# Altium PCB Powerdist Darput.PcbDoc
Units mm, origin at the board's own origin, x right, y up, seen from the top; angles counter-clockwise.
Board outline 152.4 x 101.6 mm, 2 copper layers (Top Layer, Bottom Layer); 25 components, 13 nets, 54 pads, 0 vias.
Unrouted connection lines stored in the file: 3.
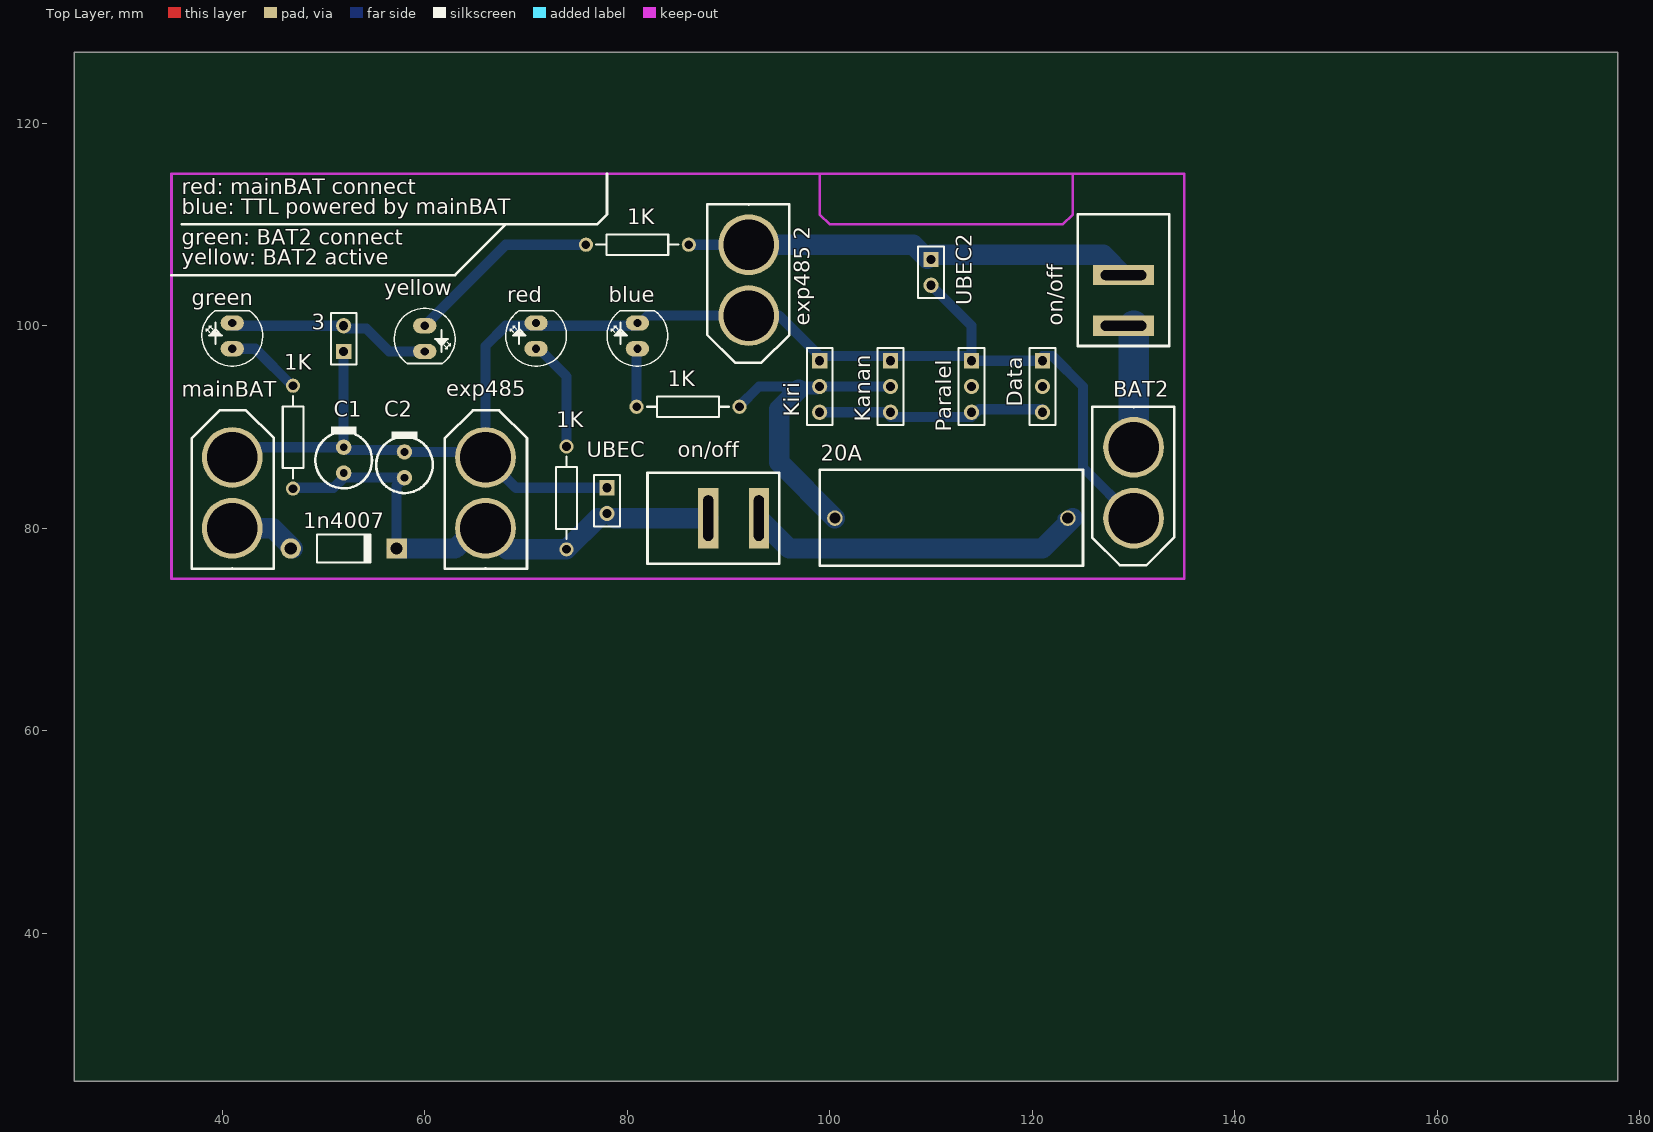
[diagram p0: Top Layer view]
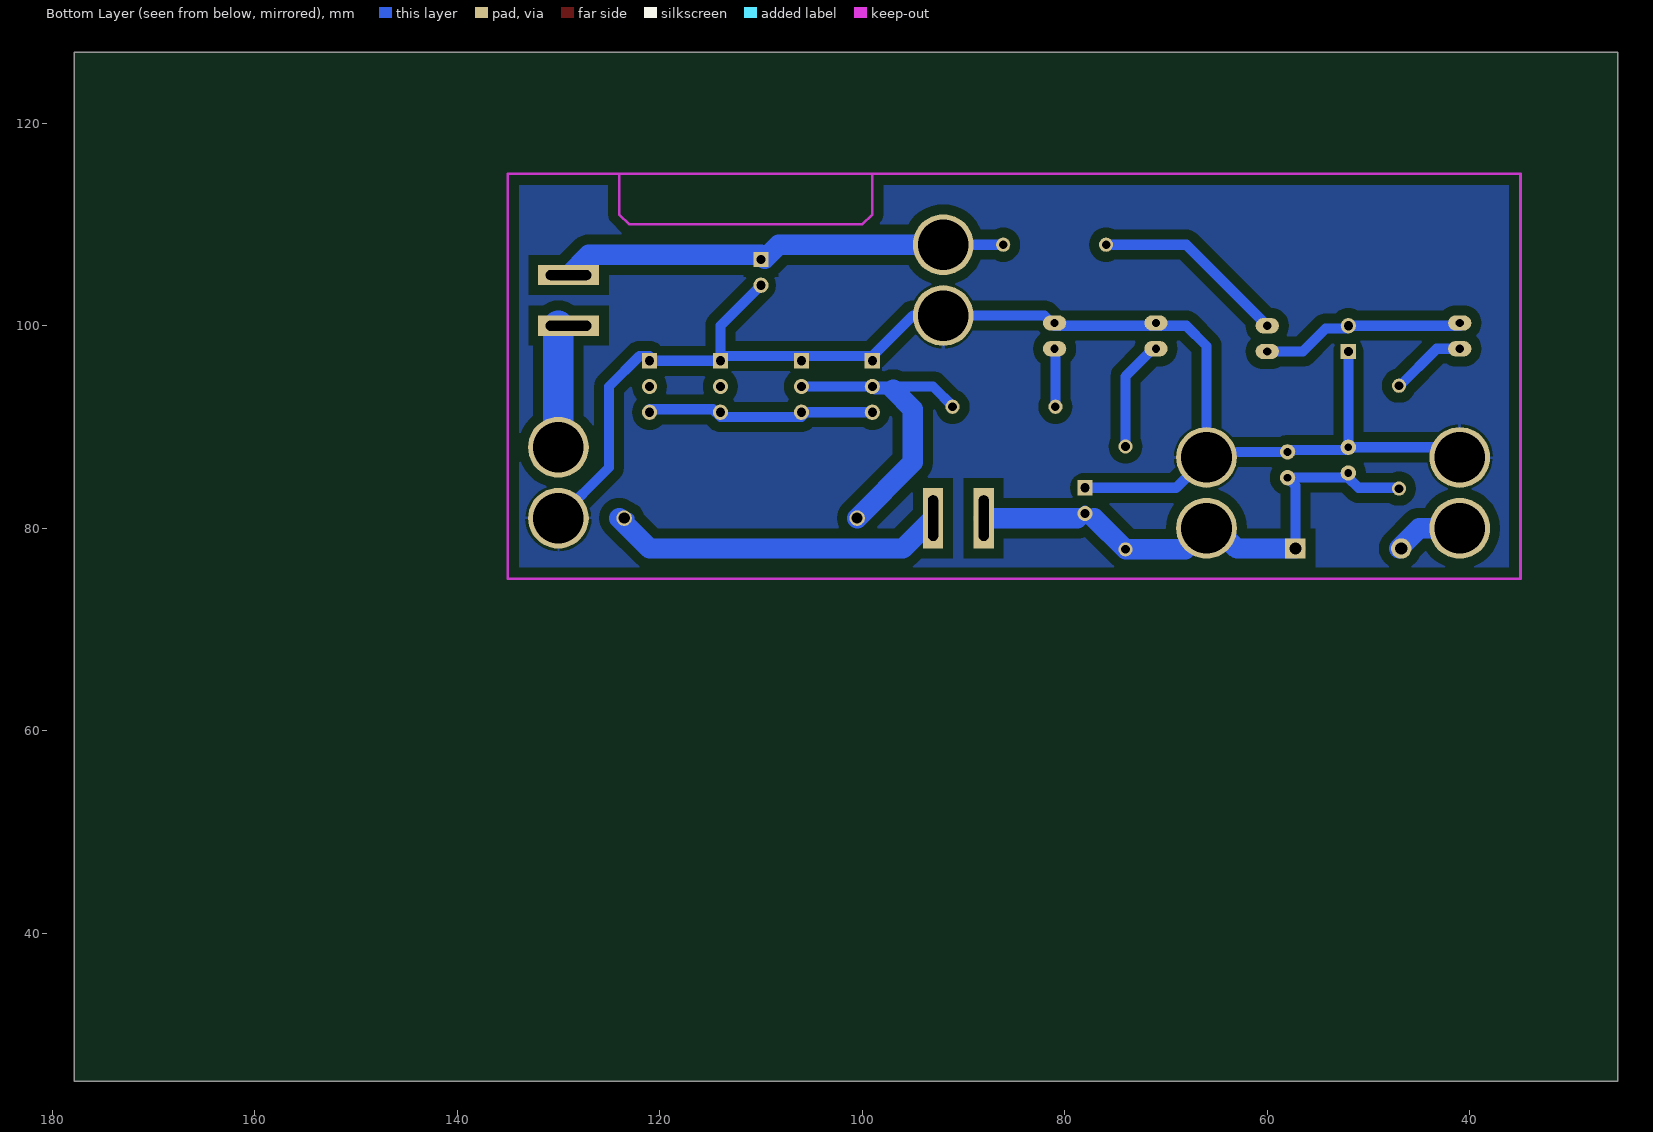
[diagram p1: Bottom Layer view, seen from below]

## Layer stack, top to bottom
Top Solder: solder mask 0.0102, Solder Resist, Dk 3.5
Top Layer: signal copper 0.0356
Dielectric 1: dielectric 0.32, FR-4, Dk 4.8
Bottom Layer: signal copper 0.0356
Bottom Solder: solder mask 0.0102, Solder Resist, Dk 3.5

## Board outline
25.4,25.4 177.8,25.4 177.8,127 25.4,127

## Design rules (kind name [scope] priority, off if disabled: settings)
Clearance [All] p1: gap=1
PolygonConnect [All] p1: connectstyle=Relief reliefconductorwidth=0.254 reliefentries=4 polygonreliefangle="90 Angle" airgapwidth=0.254
RoutingVias [All] p1: holewidth=0.711 width=1.27 viastyle="Through Hole" minholewidth=0.711 minwidth=1.27 maxholewidth=0.711 maxwidth=1.27
SolderMaskExpansion [All] p1: expansion=0.102
UnpouredPolygon [All] p1: allowunpoured=FALSE
Width [All] p1: maxlimit=1 minlimit=1 preferedwidth=1
29 further rules are at their usual default settings.

## Classes and differential pairs
component class "Powerdist Darput": 1K 1n4007 3 20A BAT2 blue C1 C2 Data exp485 green Kanan Kiri mainBAT on/off Paralel red yellow

## Components (designator, comment, footprint, x,y, rotation, side; value= is the part's Value field where it differs from the comment)
1K "Res2" AXIAL-0.4 86,92 r180 top
1K "Res1" AXIAL-0.4 74,83 r270 top (schematic designator "5 ohm")
1K "Res3" AXIAL-0.4 81,108 r180 top (schematic designator hehe)
1K "Res4" AXIAL-0.4 47,89 r90 top (schematic designator new)
1n4007 "Diode 1N4007" DO-41 52,78 r0 top (schematic designator 5A)
3 "Header 2" HDR1X2 52,97.46 r90 top
20A "Fuse" PCBComponent_1#1 103,81 r0 top
BAT2 "BAT2" PCBComponent_1#2 127,90 r270 top (schematic designator 2)
blue "Blue" "LED5mm R" 81,99 r90 top (schematic designator 3.6V)
C1 "Cap Pol" "CAPASITOR RAD 5.6 mm \"1/.2\"" 52,85.46 r270 top
C2 "Cap Pol" "CAPASITOR RAD 5.6 mm \"1/.2\"" 58,85 r270 top
Data "Header 3" HDR1X3 121,96.54 r270 top
exp485 "EXP485" PCBComponent_1#2 69,78 r90 top (schematic designator 12V)
"exp485 2" "EXP485 2" PCBComponent_1#2 89,110 r270 top (schematic designator 12V)
green "green" "LED5mm R" 41,99 r90 top (schematic designator 5V)
Kanan "Header 3" HDR1X3 106,96.54 r270 top (schematic designator "Kaki kanan")
Kiri "Header 3" HDR1X3 99,96.54 r270 top (schematic designator "Kaki kiri")
mainBAT "MainBAT" PCBComponent_1#2 44,78 r90 top (schematic designator sup)
on/off "main switch" PCBComponent_1#3 88,81 r0 top (schematic designator simple)
on/off "2nd switch" PCBComponent_1#3 129,105 r270 top (schematic designator switch)
Paralel "Header 3" HDR1X3 114,96.54 r270 top
red "Red" "LED5mm R" 71,99 r90 top (schematic designator 1.8V)
UBEC "UBEC" HDR1X2 78,84 r270 top (schematic designator 5V)
UBEC2 "UBEC2" HDR1X2 110,106.54 r270 top (schematic designator 5V)
yellow "yellow" "LED5mm R" 60,98.73 r270 top (schematic designator 7V)

## Footprints (in the part's own frame and the unit in brackets; to place one, negate y for a bottom-side part, rotate by r counter-clockwise, add the part's x,y. Pads: shape width x height; smd on the part's side, far side on the other; paste and mask are expansions set on the pad)
AXIAL-0.4 [mm] "Axial Device, Thru-Hole; 2 Leads; 0.4 in Pin Spacing"
  round 1.4 hole 0.85: 1(-5.08,0) 2(5.08,0)
  silkscreen extent -4.06,-1.02 4.06,1.02
"CAPASITOR RAD 5.6 mm \"1/.2\"" [mil]
  round 60 hole 30: 1(0,0) 2(-100,0)
  silkscreen extent -180,-110 60,110, body extent -149,-99 51,101, height 67
DO-41 [mm] "Diode, Axial; Body 5.2 x 2.7 mm (LxDia. max), Lead Dia. 0.86 mm (max)"
  round 2 hole 1.2: 1(-5.23,0)
  rect 2x2 hole 1.2: 2(5.23,0)
  silkscreen extent -2.65,-1.4 2.75,1.4
HDR1X2 [mm] "Connector; Header; 2 Position"
  rect 1.5x1.5 hole 0.9: 1(0,0)
  round 1.5 hole 0.9: 2(2.54,0)
  silkscreen extent -1.27,-1.27 3.81,1.27
HDR1X3 [mm] "Connector; Header; 3 Position"
  rect 1.5x1.5 hole 0.9: 1(0,0)
  round 1.5 hole 0.9: 2(2.54,0) 3(5.08,0)
  silkscreen extent -1.27,-1.27 6.35,1.27
"LED5mm R" [mm]
  oval 1.5x2.3 hole 0.8: 1(-1.27,0) 2(1.27,0)
  silkscreen extent -3,-3 2.46,3, body extent -3,-3 2.5,3, height 8.5
PCBComponent_1#1 [mm]
  round 1.524 hole 1.1: 1(-2.5,0) 2(20.5,0)
  silkscreen extent -4,-4.7 22,4.8
PCBComponent_1#2 [mm]
  round 6 hole 5: 1(2,3) 2(9,3)
  silkscreen extent -2,-1.1 13.65,7
PCBComponent_1#3 [mm]
  rect 2x6 hole 1 slot 4.5 at 90 deg: 1(0,0) 2(5,0)
  silkscreen extent -6,-4.5 7,4.5

## Part data
1K: "Resistor"
1K 1K 1K: library part Res2, "Resistor"
1n4007: "1 Amp General Purpose Rectifier"
3: "Header, 2-Pin"
20A on/off on/off: library part Component_1
BAT2 exp485 "exp485 2" mainBAT: library part Component_2
blue green red yellow: library part LED1, "Typical RED GaAs LED"
C1 C2: "Polarized Capacitor (Radial)"
Data Kanan Kiri Paralel: "Header, 3-Pin"
UBEC UBEC2: library part "Header 2", "Header, 2-Pin"

## Nets (pads, with @x,y where several pads share a name; then routed paths per layer and width w, separated by ;. In a path a pad name is that pad's centre, name@x,y a point inside that pad or via, vN(x,y) a via of type N, cw(c..) or ccw(c..) an arc to the next point about the centre after c; other vN are vias at no path point)
DATA: Data.3 Kanan.3 Kiri.3 Paralel.3 | length 22.5
  Bottom Layer w1: Kiri.3 105.54,91.46 106,91 114,91 114.75,91.75 Data.3@121,91.75
GND: 3.1 "exp485 2.2" BAT2.2 blue.2 C1.2 C2.2 Data.1 exp485.2 Kanan.1 Kiri.1 mainBAT.2 Paralel.1 red.2 UBEC2.2 UBEC.1 | length 147.2
  Bottom Layer w1: mainBAT.2 42,88 C1.2 ; 3.1 C1.2 ; UBEC.1 69,84 exp485.2 ; UBEC2.2 114,100 Paralel.1@114,97 ; Paralel.1 Paralel.1@114,97 ; Data.1 114.46,96.54 Paralel.1@114,97 ; Data.1@121,97 122,97 125,94 125,86 BAT2.2 ; C1.2 52.278,87.722 58,87.722 C2.2 65.46,87.54 exp485.2 ; exp485.2 66,98 68,100 81,100 82,101 92,101 95,101 99,97 Paralel.1@114,97
Net1.8V_1: 1K.1@74,88.08 red.1 | length 11.2
  Bottom Layer w1: red.1@71,98 74,95 1K.1@74,88.08
Net1K_1: 1K.1@91.08,92 20A.1 Kanan.2 Kiri.2 | length 33.8
  Bottom Layer w1: 1K.1@91,92 93,94 Kiri.2 ; 96.942,93.71 98.71,93.71 Kiri.2 ; Kanan.2 Kiri.2
  Bottom Layer w2: 96.942,93.71 95,91.768 95,86.5 20A.1
Net1K_2: 1K.2@80.92,92 blue.1 | length 6
  Bottom Layer w1: 1K.2@80.92,92 80.92,97.92 blue.1@81,98
Net2_1: BAT2.1 on/off.2@129,100 | length 12
  Bottom Layer w3: BAT2.1 on/off.2@130,100
Net3_2: 3.2 green.2 yellow.2 | length 20.1
  Bottom Layer w1: green.2@41,100 3.2 52.29,99.71 54.25,99.71 56.5,97.46 yellow.2
Net5A_1: 1n4007.1 mainBAT.1 | length 6.8
  Bottom Layer w2: mainBAT.1 45,80 1n4007.1@47,78
Net5A_2: 1K.1@47,83.92 1K.2@74,77.92 1n4007.2 C1.1 C2.1 exp485.1 on/off.1@88,81 UBEC.2 | length 53.5
  Bottom Layer w1: 1K.1@47,84 51,84 52,85 C2.1 57.23,84.23 1n4007.2 ; exp485.1@65,80 exp485.1 exp485.1@68.08,77.92 ; 77.08,81 78,81 UBEC.2 78,81.75 78.75,81
  Bottom Layer w2: 1n4007.2 63,78 exp485.1@65,80 ; exp485.1@68.08,77.92 74,77.92 77.08,81 ; 78.75,81 on/off.1@88,81
Net5V_1: 1K.2@47,94.08 green.1 | length 45.6
  Bottom Layer w1: green.1 43.27,97.73 1K.2@47,94
  Bottom Layer w2: 92,108 108.25,108 109.625,106.625 ; 110,107 127,107 129,105
Net5V_1: 1K.1@86.08,108 "exp485 2.1" on/off.1@129,105 UBEC2.1 | length 6
  Bottom Layer w1: 1K.1@86,108 86.08,108 92,108
Net7V_1: 1K.2@75.92,108 yellow.1 | length 19.2
  Bottom Layer w1: yellow.1 68,108 1K.2@75.92,108
Net20A_2: 20A.2 on/off.2@93,81 | length 34.5
  Bottom Layer w1: 20A.2@123,81 20A.2 20A.2@124,81
  Bottom Layer w2: on/off.2@93,81 96,78 121,78 20A.2@124,81
pads on no net: Data.2 Paralel.2

## Polygon pours and split planes (outlines as drawn)
GND on Bottom Layer "Top Layer-No Net" (solid, pour order 2): 35,115 35,75 135,75 135,115 124,115 124,111 123,110 100,110 99,111 99,115 35,115

## Keep-outs
Keep-Out Layer:
  lines w0.254: 99,115 99,111 100,110 ; 124,115 124,114 124,111 123,110 100,110 ; 100,110 100,110 ; 35,75 35,115 135,115 135,75 35,75
  text "powerdist DarPut" at 100,112 h1.52

## Silkscreen, mask and mechanical layers (free items; w line width, h text height)
Top Overlay:
  lines w0.254: 35,105 63,105 68,110 ; 36,110 77,110 78,111 78,115
  text "red: mainBAT connect" at 36,113 h1.52
  text "blue: TTL powered by mainBAT" at 36,111 h1.52
  text "green: BAT2 connect" at 36,108 h1.52
  text "yellow: BAT2 active" at 36,106 h1.52

## Dimensions
139,115 to 140,75 on Keep-Out Layer
35,118 to 135,118 on Keep-Out Layer